# Altium PCB Electronic_Board_PCB.PcbDoc
Units mm, origin at the board's own origin, x right, y up, seen from the top; angles counter-clockwise.
Board outline 63 x 63 mm, 2 copper layers (Top Layer, Bottom Layer); 20 components, 5 nets, 40 pads, 0 vias.
Unrouted connection lines stored in the file: 24.
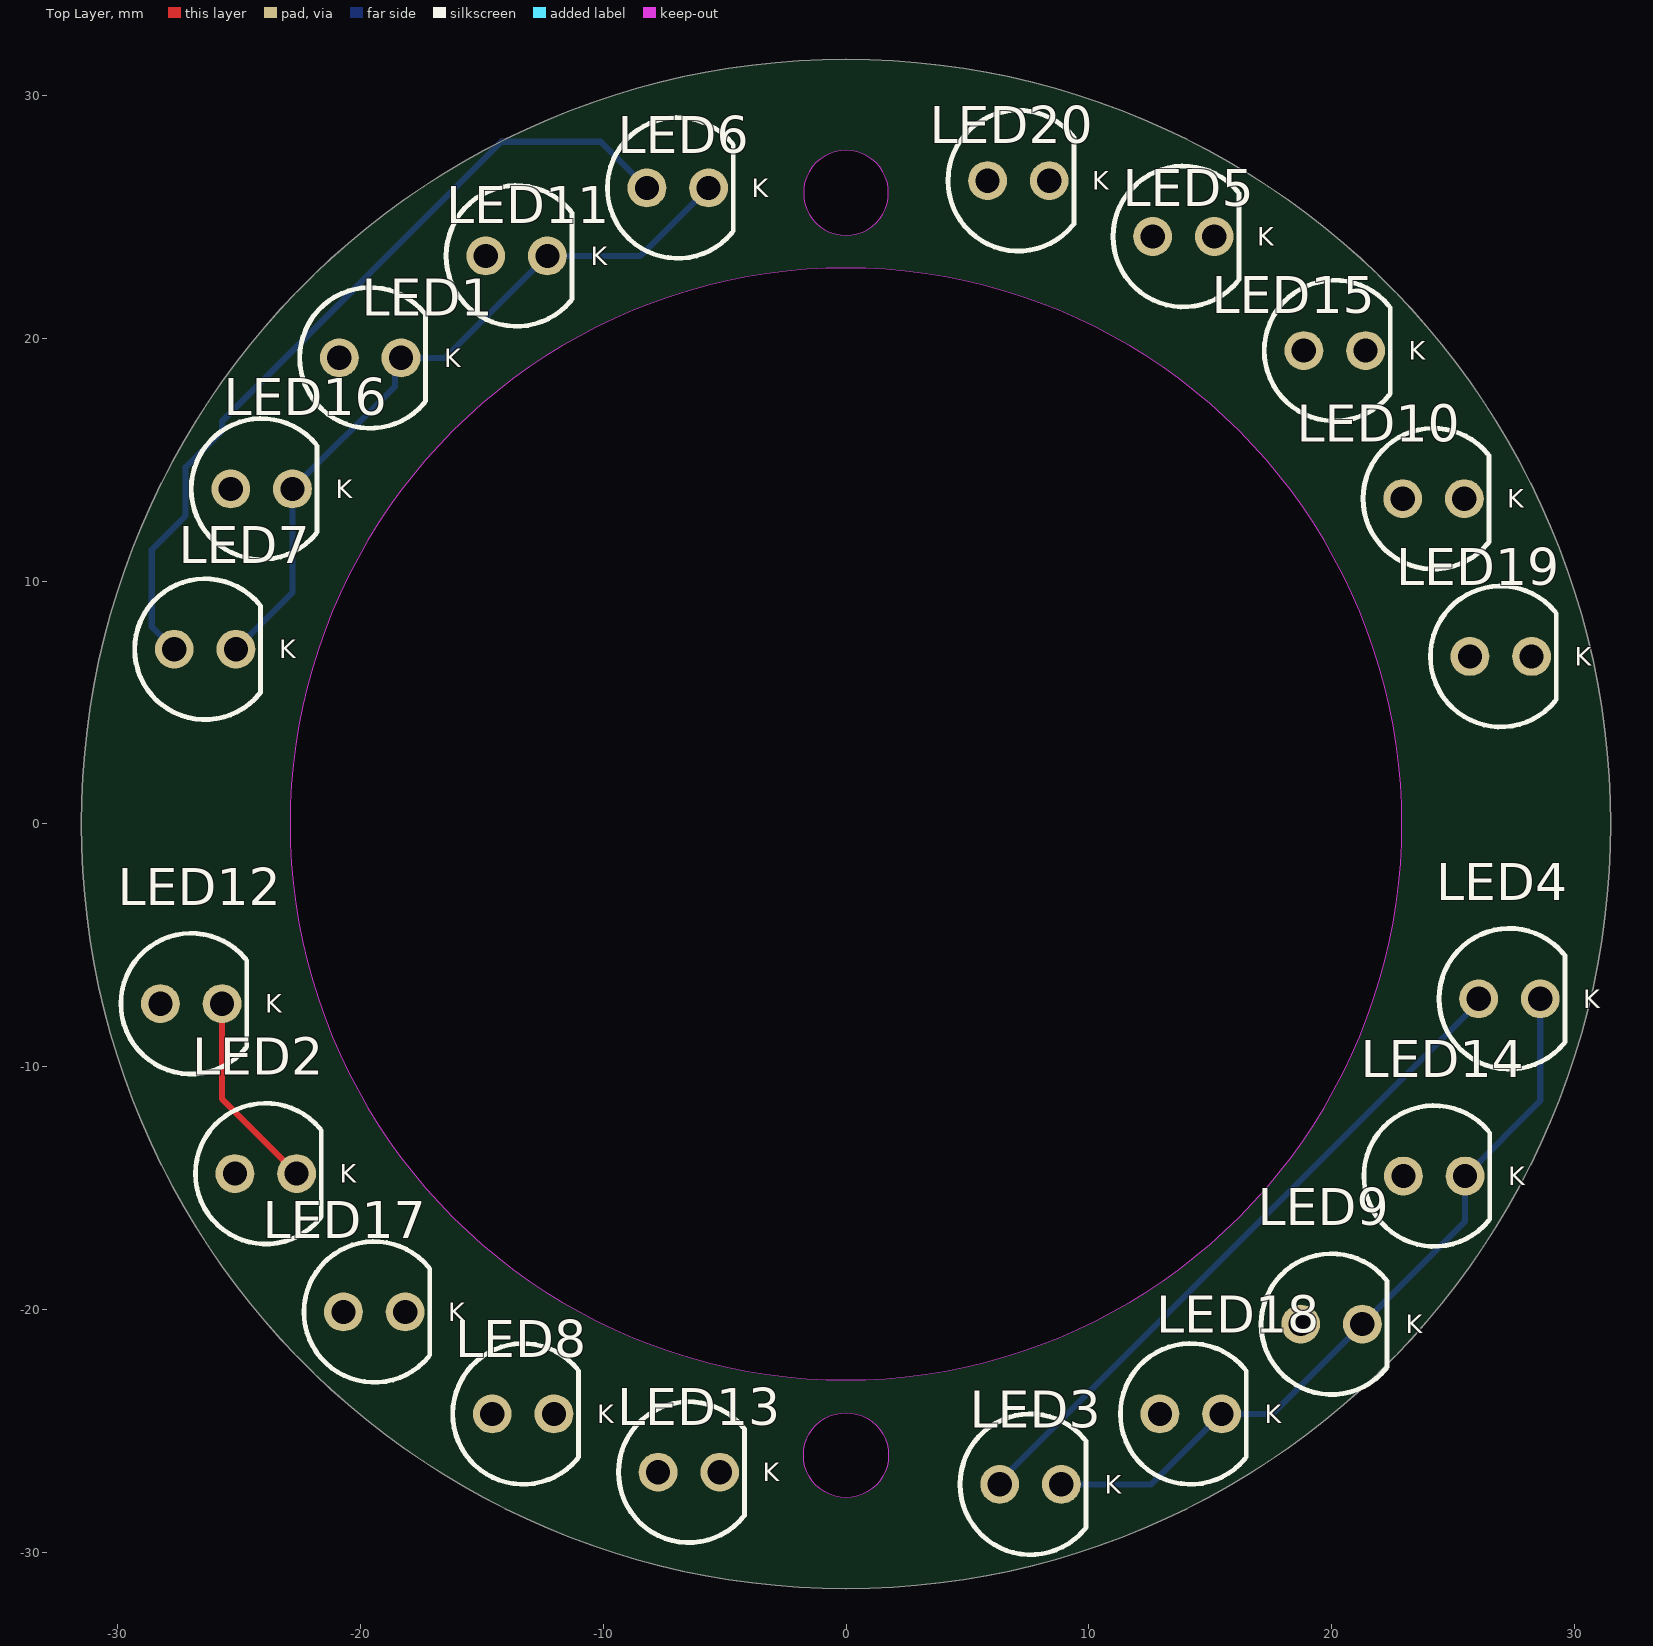
[diagram p0: Top Layer view]
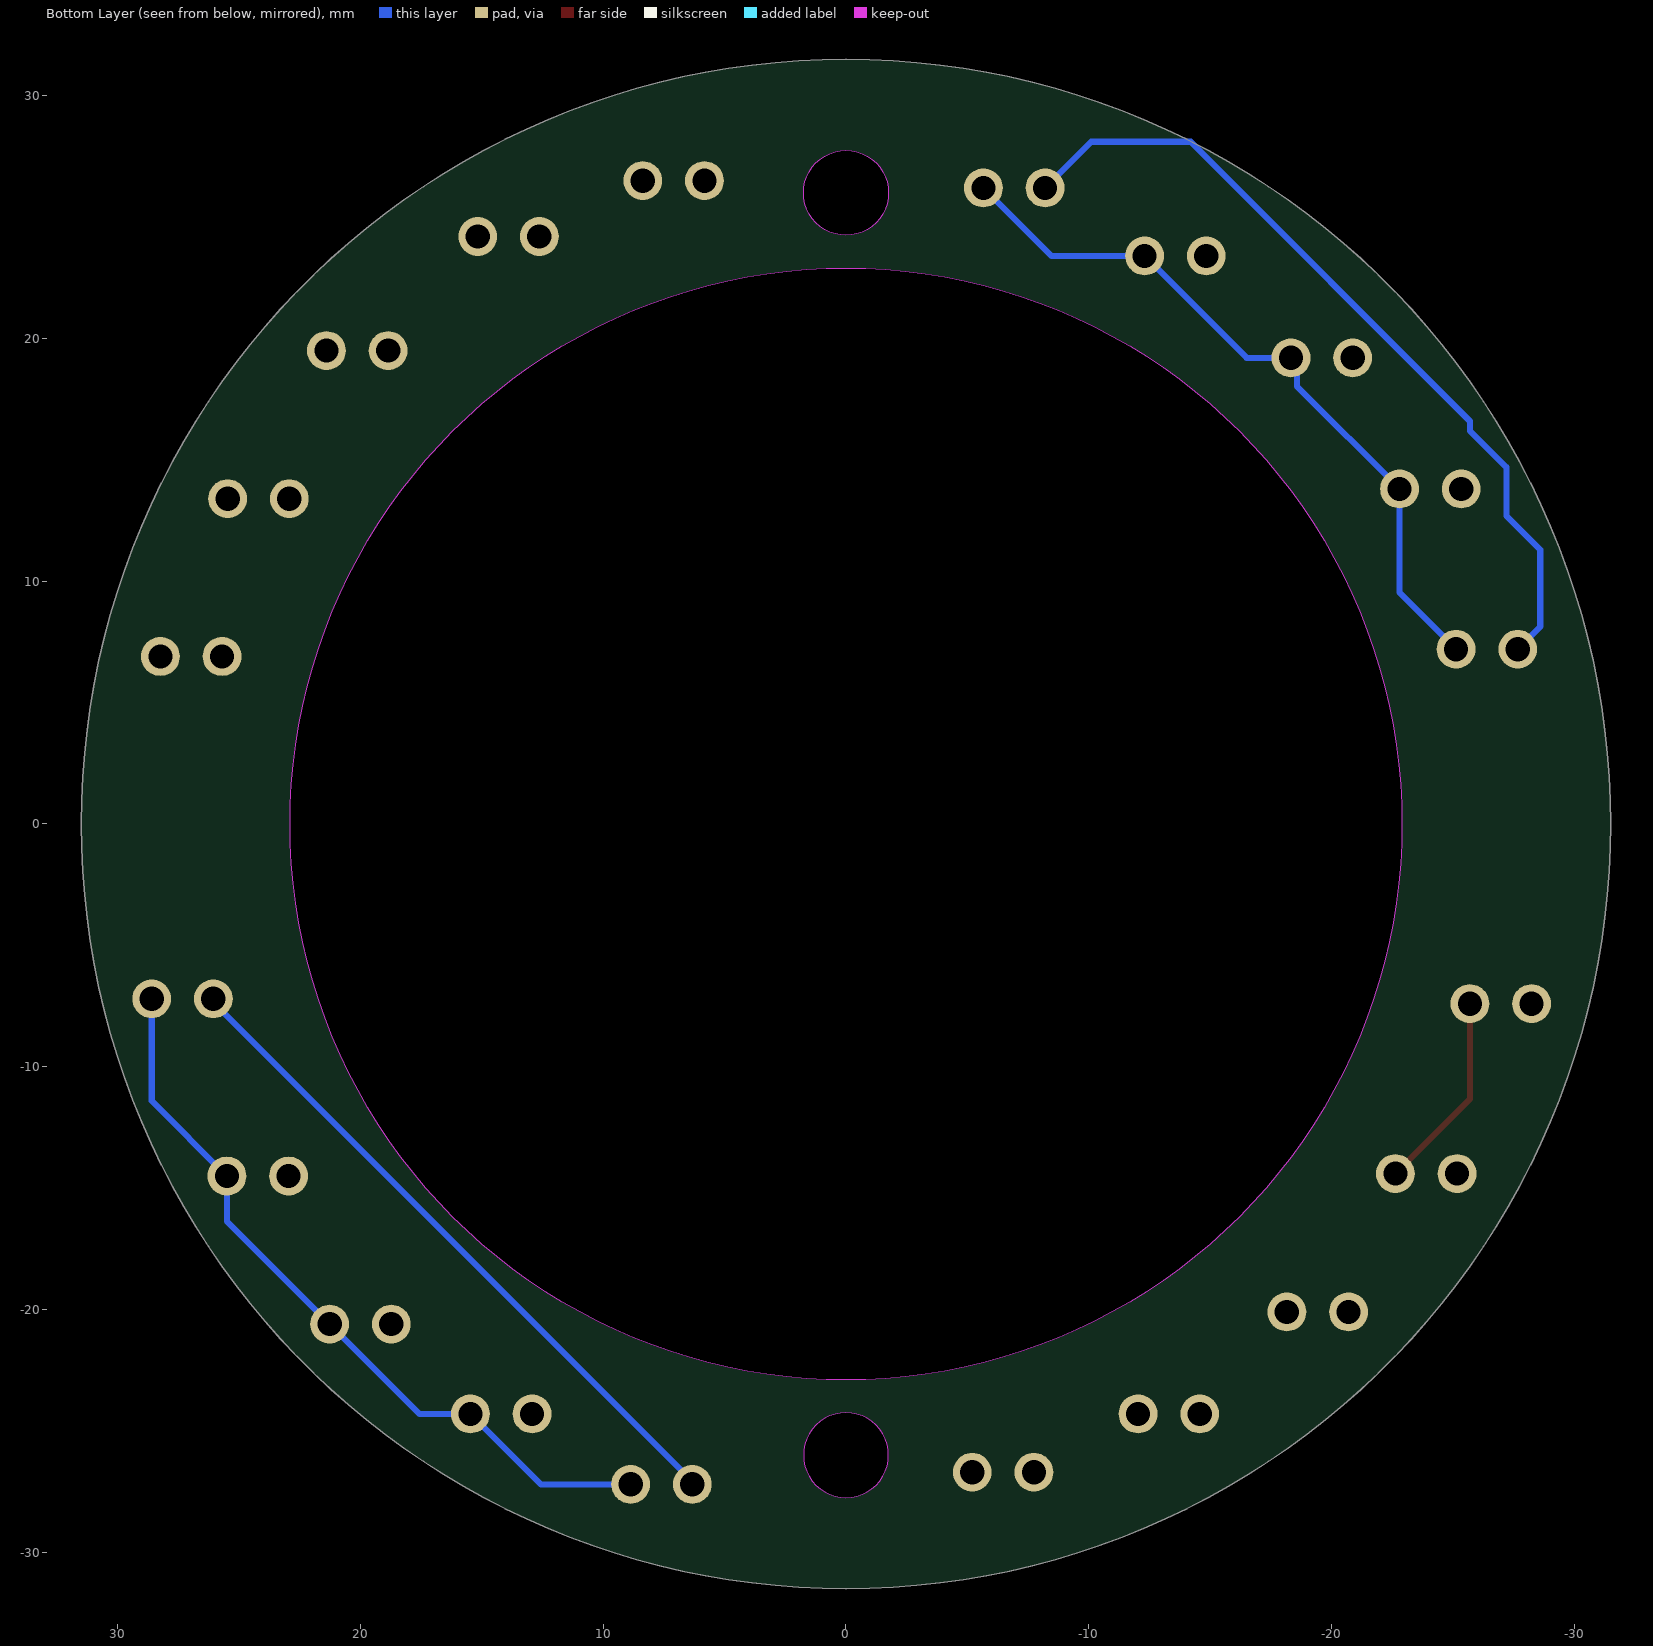
[diagram p1: Bottom Layer view, seen from below]

## Layer stack, top to bottom
Top Solder: solder mask 0.0102, Solder Resist, Dk 3.5
Top Layer: signal copper 0.0356
Dielectric 1: dielectric 0.32, FR-4, Dk 4.8
Bottom Layer: signal copper 0.0356
Bottom Solder: solder mask 0.0102, Solder Resist, Dk 3.5

## Board outline
-31.5,0 ccw(c0,0) 0,-31.5 ccw(c0,0) 31.5,0 ccw(c0,0) 0,31.5 ccw(c0,0)
cut-out: -22.9,0 ccw(c0,0) 0,-22.9 ccw(c0,0) 22.9,0 ccw(c0,0) 0,22.9 ccw(c0,0)
cut-out: -1.75,26 ccw(c0,26) 0,24.25 ccw(c0,26) 1.75,26 ccw(c0,26) 0,27.75 ccw(c0,26)
cut-out: -1.75,-26 cw(c0,-26) 0,-24.25 cw(c0,-26) 1.75,-26 cw(c0,-26) 0,-27.75 cw(c0,-26)

## Design rules (kind name [scope] priority, off if disabled: settings)
Clearance [All] p1: gap=0.254 ignorepadtopadclearanceinfootprint=FALSE except(0: Arc-Hole Track-Hole SMDPad-Hole THPad-Hole Via-Hole Fill-Hole Poly-Hole Region-Hole Text-Hole)
PolygonConnect [All] p1: connectstyle=Relief reliefconductorwidth=0.254 reliefentries=4 polygonreliefangle="90 Angle" airgapwidth=0.254
RoomDefinition Electronic_Board_Schematic [InComponentClass('Electronic_Board_Schematic')] p1: confinementstyle=ConfineIn formatcopy=TRUE lockcomponents=FALSE outline -102.743,-75.565 -51.943,-75.565 -51.943,-50.165 -102.743,-50.165
RoutingVias [All] p1: holewidth=0.711 width=1.27 viastyle="Through Hole" minholewidth=0.711 minwidth=1.27 maxholewidth=0.711 maxwidth=1.27
SolderMaskExpansion [All] p1: expansion=0.102 istentingtop=FALSE
Width [All] p1: maxlimit=0.254 minlimit=0.254 preferedwidth=0.254
30 further rules are at their usual default settings.

## Components (designator, comment, footprint, x,y, rotation, side; value= is the part's Value field where it differs from the comment)
LED1 "151053RS03000" "Type 5mm" -19.6,19.2 r0 top
LED2 "151053RS03000" "Type 5mm" -23.9,-14.4 r0 top
LED3 "151053RS03000" "Type 5mm" 7.6,-27.2 r0 top
LED4 "151053RS03000" "Type 5mm" 27.33,-7.2 r0 top
LED5 "151053RS03000" "Type 5mm" 13.9,24.2 r0 top
LED6 "151053RS03000" "Type 5mm" -6.93,26.2 r0 top
LED7 "151053RS03000" "Type 5mm" -26.4,7.2 r0 top
LED8 "151053RS03000" "Type 5mm" -13.3,-24.3 r0 top
LED9 "151053RS03000" "Type 5mm" 20,-20.6 r0 top
LED10 "151053RS03000" "Type 5mm" 24.2,13.4 r0 top
LED11 "151053RS03000" "Type 5mm" -13.57,23.4 r0 top
LED12 "151053RS03000" "Type 5mm" -26.97,-7.4 r0 top
LED13 "151053RS03000" "Type 5mm" -6.47,-26.7 r0 top
LED14 "151053RS03000" "Type 5mm" 24.23,-14.5 r0 top
LED15 "151053RS03000" "Type 5mm" 20.13,19.5 r0 top
LED16 "151053RS03000" "Type 5mm" -24.07,13.8 r0 top
LED17 "151053RS03000" "Type 5mm" -19.43,-20.1 r0 top
LED18 "151053RS03000" "Type 5mm" 14.2,-24.3 r0 top
LED19 "151053RS03000" "Type 5mm" 26.97,6.9 r0 top
LED20 "151053RS03000" "Type 5mm" 7.1,26.5 r0 top

## Footprints (in the part's own frame and the unit in brackets; to place one, negate y for a bottom-side part, rotate by r counter-clockwise, add the part's x,y. Pads: shape width x height; smd on the part's side, far side on the other; paste and mask are expansions set on the pad)
"Type 5mm" [mm] "THT, LED-5mm, 2pin- Body 5.8mm"
  round 1.6 hole 1: 1(1.27,0) 2(-1.27,0)
  silkscreen extent -2.9,-2.9 2.29,2.9, body extent -2.9,-2.9 2.5,2.9, height 11.7

## Part data
LED1 LED2 LED3 LED4 LED5 LED6 LED7 LED8 LED9 LED10 LED14 LED16 LED17 LED18 LED19 LED20: library part CMP-1489-00007-1, "THT LED round mono-color waterclear,  WL-TMRW ,Red", Emitting Color=Red, Manufacturer="Wuerth Elektronik", ComponentLink1Description="Manufacturer URL", ComponentLink1URL=http://www.we-online.com, ComponentLink2Description=Datasheet, ComponentLink2URL=http://katalog.we-online.de/pbs/datasheet/7448042001.pdfhttp://katalog.we-online.de/pbs/datasheet/7448042001.pdfhttp://katalog.we-online.de/pbs/datasheet/7448042001.pdfhttp://katalog.we-online.de/pbs/datasheet/151053RS03000.pdf, PackageReference="Type 5mm", PartNumber=151053RS03000
LED11 LED12 LED13 LED15: library part CMP-1489-00007-1, "THT LED round mono-color waterclear,  WL-TMRW ,Red", Case/Package=T, Color=Green, Emitting Color=Red, Forward Current=30mA, Forward Voltage=2.1V, Manufacturer="Wuerth Elektronik", Manufacturer Part Number=HLMP-1503, Max Operating Temperature=100°C, Min Operating Temperature=-20°C, Package Quantity=2000, Reverse Voltage=5V, Supplier Part Number 1=516-1293-ND, Test Current=10mA, Category=LEDs, ComponentLink1Description="Manufacturer URL", ComponentLink1URL=http://www.we-online.com, ComponentLink2Description=Datasheet, ComponentLink2URL=http://katalog.we-online.de/pbs/datasheet/7448042001.pdfhttp://katalog.we-online.de/pbs/datasheet/7448042001.pdfhttp://katalog.we-online.de/pbs/datasheet/7448042001.pdfhttp://katalog.we-online.de/pbs/datasheet/151053RS03000.pdf, ComponentLink3Description=https://datasheet.ciiva.com/11775/0900766b80026841-11775015.pdf?src-supplier=RSComponents, ComponentLink3URL=https://datasheet.ciiva.com/11775/0900766b80026841-11775015.pdf?src-supplier=RSComponents, ComponentLink4Description=https://datasheet.ciiva.com/15117/getdatasheetpartid-117200-15117575.pdf?src-supplier=Verical, ComponentLink4URL=https://datasheet.ciiva.com/15117/getdatasheetpartid-117200-15117575.pdf?src-supplier=Verical, ComponentLink5Description=https://datasheet.ciiva.com/11773/0900766b800a3de2-11773965.pdf?src-supplier=RSComponents, ComponentLink5URL=https://datasheet.ciiva.com/11773/0900766b800a3de2-11773965.pdf?src-supplier=RSComponents, ComponentLink6Description=https://datasheet.ciiva.com/29334/180612-da-01-en-led-3mm-hlmp-1503-gruen-29334880.pdf?src-supplier=Conrad, ComponentLink6URL=https://datasheet.ciiva.com/29334/180612-da-01-en-led-3mm-hlmp-1503-gruen-29334880.pdf?src-supplier=Conrad, ComponentLink7Description=https://datasheet.ciiva.com/14604/70157734-14604090.pdf?src-supplier=Allied+Electronics, ComponentLink7URL=https://datasheet.ciiva.com/14604/70157734-14604090.pdf?src-supplier=Allied+Electronics, Depth=3.43mm, Diameter=3mm, Dominant Wavelength=569nm, Height=6.35mm, Illumination Color=Green, Lead Free="Lead Free", Lead Length=25.4mm, Length=3.43mm, Lens Color=Green, Lens Size=3mm, Lens Style=Dome,Diffused,Colored,Circular,Round, Lens Transparency=Diffused, Luminous Intensity=1mcd, Min Supply Voltage=2.1V, Mount="Through Hole", Number of Elements=1, Number of LEDs=1, Number of Pins=2, PackageReference="Type 5mm", Packaging=Bulk, PartNumber=151053RS03000, Pricing 1="1=0.48000, 10=0.29800, 100=0.17110, 1000=0.13394, 2000=0.12278, 5000=0.11162, 10000=0.10530 (USD)", Radiation Hardening=No, REACH SVHC="No SVHC", RoHS=Yes, RoHS Compliant=Yes, Series=-, Stock 1=88920, Supplier 1=Digi-Key, Viewing Angle=60°, Voltage Rating=5V, Wavelength=569nm

## Nets (pads, with @x,y where several pads share a name; then routed paths per layer and width w, separated by ;. In a path a pad name is that pad's centre, name@x,y a point inside that pad or via, vN(x,y) a via of type N, cw(c..) or ccw(c..) an arc to the next point about the centre after c; other vN are vias at no path point)
GND: LED1.1 LED2.1 LED3.1 LED4.1 LED5.1 LED6.1 LED7.1 LED8.1 LED9.1 LED10.1 LED11.1 LED12.1 LED13.1 LED14.1 LED15.1 LED16.1 LED17.1 LED18.1 LED19.1 LED20.1 | length 70.2
  Top Layer w0.254: LED12.1 -25.7,-11.33 LED2.1
  Bottom Layer w0.254: LED7.1 -22.8,9.53 LED16.1 -18.581,18.019 -18.581,18.949 LED1.1 -16.5,19.2 LED11.1 -8.46,23.4 LED6.1 ; LED3.1 12.57,-27.2 LED18.1 17.57,-24.3 LED9.1 25.5,-16.37 LED14.1 28.6,-11.4 LED4.1
NetLED1_2: LED1.2 LED2.2 LED3.2 LED4.2 LED5.2 | length 28.2
  Bottom Layer w0.254: LED3.2 6.33,-27.065 26.06,-7.335 LED4.2
NetLED6_2: LED6.2 LED7.2 LED8.2 LED9.2 LED10.2 | length 34
  Bottom Layer w0.254: LED7.2 -28.6,8.13 -28.6,11.3 -27.2,12.7 -27.2,14.7 -25.7,16.2 -25.7,16.6 -14.2,28.1 -10.1,28.1 LED6.2
NetLED11_2: LED11.2 LED12.2 LED13.2 LED14.2 LED15.2
NetLED16_2: LED16.2 LED17.2 LED18.2 LED19.2 LED20.2

## Silkscreen, mask and mechanical layers (free items; w line width, h text height)
Mechanical 1:
  circle w0.254: c-24.181,13.815 r2.75
  circle w0.254: c-7.301,26.768 r2.75
  circle w0.254: c-26.959,7.109 r2.75
  circle w0.254: c26.853,7.194 r2.75
  circle w0.254: c13.9,24.075 r2.75
  circle w0.254: c19.658,19.658 r2.75
  circle w0.254: c24.075,13.9 r2.75
  circle w0.254: c7.195,26.853 r2.75
  circle w0.254: c-14.006,23.99 r2.75
  circle w0.254: c-7.195,-26.853 r2.75
  circle w0.254: c-24.075,-13.9 r2.75
  circle w0.254: c-19.658,-19.658 r2.75
  circle w0.254: c-13.9,-24.075 r2.75
  circle w0.254: c14.006,-23.99 r2.75
  circle w0.254: c19.764,-19.573 r2.75
  circle w0.254: c24,-13.9 r2.75
  circle w0.254: c-19.764,19.573 r2.75
  circle w0.254: c-26.853,-7.194 r2.75
  circle w0.254: c26.959,-7.109 r2.75
  circle w0.254: c7.301,-26.768 r2.75
  circle w0.254: c0,0 r31.5
  circle w0.254: c0,0 r22.9
  circle w0.254: c0,0 r27.8
  circle w0.254: c0,-26 r1.75
  circle w0.254: c0,26 r1.75

## Text inside footprints (layer, text, board x,y; h text height)
LED1: Mechanical 15 "K" at -16.552,18.819 h0.76; Top Overlay "K" at -16.552,18.819 h0.76
LED2: Mechanical 15 "K" at -20.852,-14.781 h0.76; Top Overlay "K" at -20.852,-14.781 h0.76
LED3: Mechanical 15 "K" at 10.648,-27.581 h0.76; Top Overlay "K" at 10.648,-27.581 h0.76
LED4: Mechanical 15 "K" at 30.378,-7.581 h0.76; Top Overlay "K" at 30.378,-7.581 h0.76
LED5: Mechanical 15 "K" at 16.948,23.819 h0.76; Top Overlay "K" at 16.948,23.819 h0.76
LED6: Mechanical 15 "K" at -3.882,25.819 h0.76; Top Overlay "K" at -3.882,25.819 h0.76
LED7: Mechanical 15 "K" at -23.352,6.819 h0.76; Top Overlay "K" at -23.352,6.819 h0.76
LED8: Mechanical 15 "K" at -10.252,-24.681 h0.76; Top Overlay "K" at -10.252,-24.681 h0.76
LED9: Mechanical 15 "K" at 23.048,-20.981 h0.76; Top Overlay "K" at 23.048,-20.981 h0.76
LED10: Mechanical 15 "K" at 27.248,13.019 h0.76; Top Overlay "K" at 27.248,13.019 h0.76
LED11: Mechanical 15 "K" at -10.522,23.019 h0.76; Top Overlay "K" at -10.522,23.019 h0.76
LED12: Mechanical 15 "K" at -23.922,-7.781 h0.76; Top Overlay "K" at -23.922,-7.781 h0.76
LED13: Mechanical 15 "K" at -3.422,-27.081 h0.76; Top Overlay "K" at -3.422,-27.081 h0.76
LED14: Mechanical 15 "K" at 27.278,-14.881 h0.76; Top Overlay "K" at 27.278,-14.881 h0.76
LED15: Mechanical 15 "K" at 23.178,19.119 h0.76; Top Overlay "K" at 23.178,19.119 h0.76
LED16: Mechanical 15 "K" at -21.022,13.419 h0.76; Top Overlay "K" at -21.022,13.419 h0.76
LED17: Mechanical 15 "K" at -16.382,-20.481 h0.76; Top Overlay "K" at -16.382,-20.481 h0.76
LED18: Mechanical 15 "K" at 17.248,-24.681 h0.76; Top Overlay "K" at 17.248,-24.681 h0.76
LED19: Mechanical 15 "K" at 30.018,6.519 h0.76; Top Overlay "K" at 30.018,6.519 h0.76
LED20: Mechanical 15 "K" at 10.148,26.119 h0.76; Top Overlay "K" at 10.148,26.119 h0.76